# EAGLE board TinyNES_Enclosure_Front (EAGLE 9.6.2)
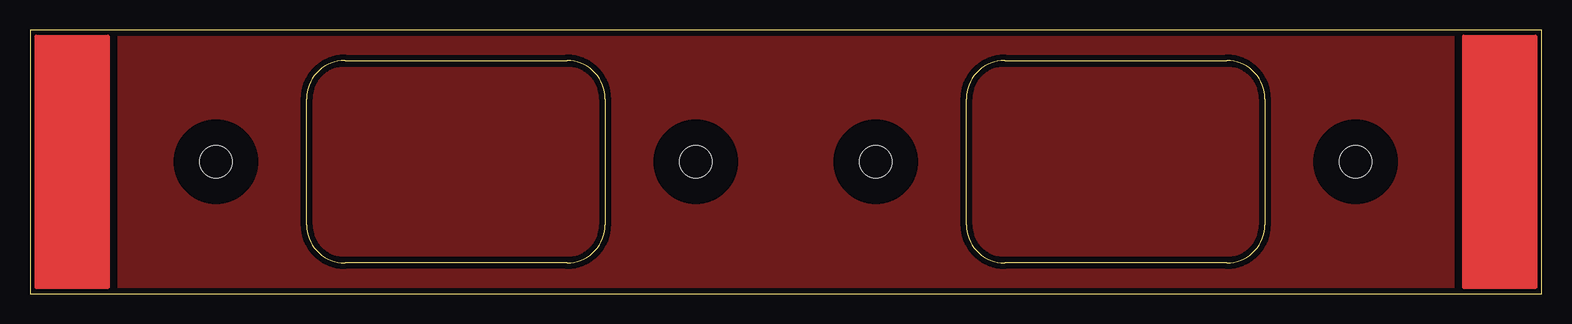
[diagram p0: board, top side]
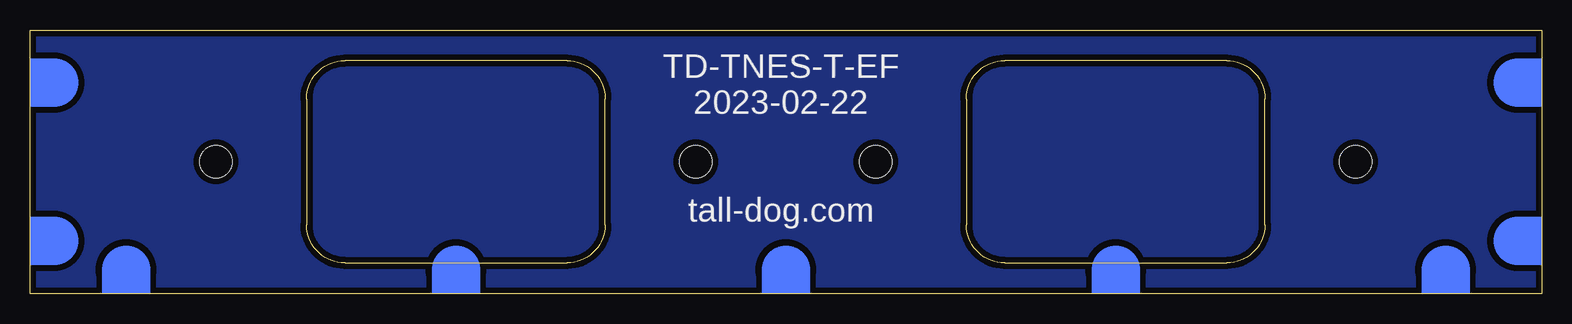
[diagram p1: board, bottom side, seen from below]

Size 126 x 22 mm. Coordinates in mm from the lower left corner, seen from the top.
Outline: 126,0 126,22 0,22 0,0 126,0
Outline: 47.95,16.25 47.95,5.75 arc-90 44.75,2.55 26.25,2.55 arc-90 23.05,5.75 23.05,16.25 arc-90 26.25,19.45 44.75,19.45 arc-90 47.95,16.25
Outline: 102.95,16.25 102.95,5.75 arc-90 99.75,2.55 81.25,2.55 arc-90 78.05,5.75 78.05,16.25 arc-90 81.25,19.45 99.75,19.45 arc-90 102.95,16.25
Copper layers (1*16): Top 0.035mm / dielectric 1.5mm / Bottom 0.035mm
Design rules "default *": minimum track width 6mil, minimum drill 0.35mm, track to track 6mil, track to pad 6mil, pad to pad 6mil, via to via 6mil, smd to smd 6mil, copper to edge 20mil, drill to drill 6mil, minimum pad ring 10mil, minimum via ring 8mil, stop-mask expansion 0mil, vias tented up to drill 0mil, thermal gap 10mil

## Footprints (pad centres in the part's own frame; a part is rotated, then mirrored left to right if it is on the bottom)
_COUNTERSINK-M2.5-TOP = hole 2.7: 0,0

## Placement (x,y rotation side)
E$1  [_ENCLOSURE-PATTERN]  122.5,11 0 top
E$5  [_ENCLOSURE-PATTERN]  3.5,11 0 top
E$58  [_ENCLOSURE-SOLDER-POINT]  126,17.6 90 bottom
E$59  [_ENCLOSURE-SOLDER-POINT]  126,4.4 90 bottom
E$60  [_ENCLOSURE-SOLDER-POINT]  0,17.6 270 bottom
E$61  [_ENCLOSURE-SOLDER-POINT]  0,4.4 270 bottom
E$62  [_ENCLOSURE-SOLDER-POINT]  118,0 180 bottom
E$63  [_ENCLOSURE-SOLDER-POINT]  90.5,0 180 bottom
E$64  [_ENCLOSURE-SOLDER-POINT]  63,0 180 bottom
E$65  [_ENCLOSURE-SOLDER-POINT]  35.5,0 180 bottom
E$66  [_ENCLOSURE-SOLDER-POINT]  8,0 180 bottom
E$67  [_COUNTERSINK-M2.5-TOP]  110.5,11 90 top
E$68  [_COUNTERSINK-M2.5-TOP]  70.5,11 90 top
E$69  [_COUNTERSINK-M2.5-TOP]  55.5,11 90 top
E$70  [_COUNTERSINK-M2.5-TOP]  15.5,11 90 top

## Library data of the parts
E$1 E$5 E$58-E$70 = TinyNES_Library

## Tracks (layer width: path | path; a pad name or v marks a point on that pad's centre or on a via)
GND
  pour Top (isolate 0.508): 118.5,22 7.5,22 7.5,0 118.5,0
  pour Bottom (isolate 0.508): 126,22 0,22 0,0 126,0

## Text on the board
bPlace: TD-TNES-T-EF / 2023-02-22 / / / tall-dog.com